# EAGLE board ssop28 (EAGLE 5.11)
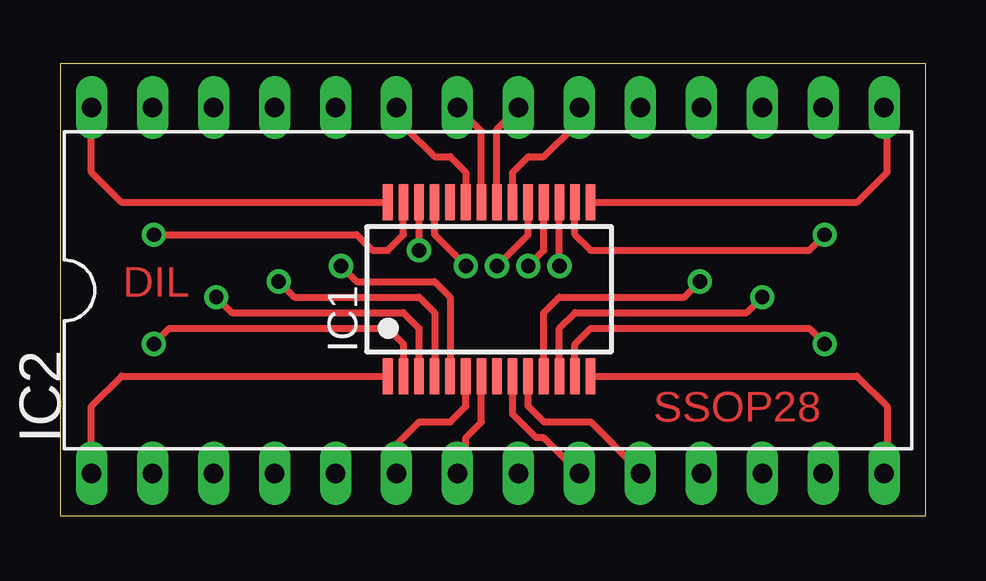
[diagram p0: board, top side]
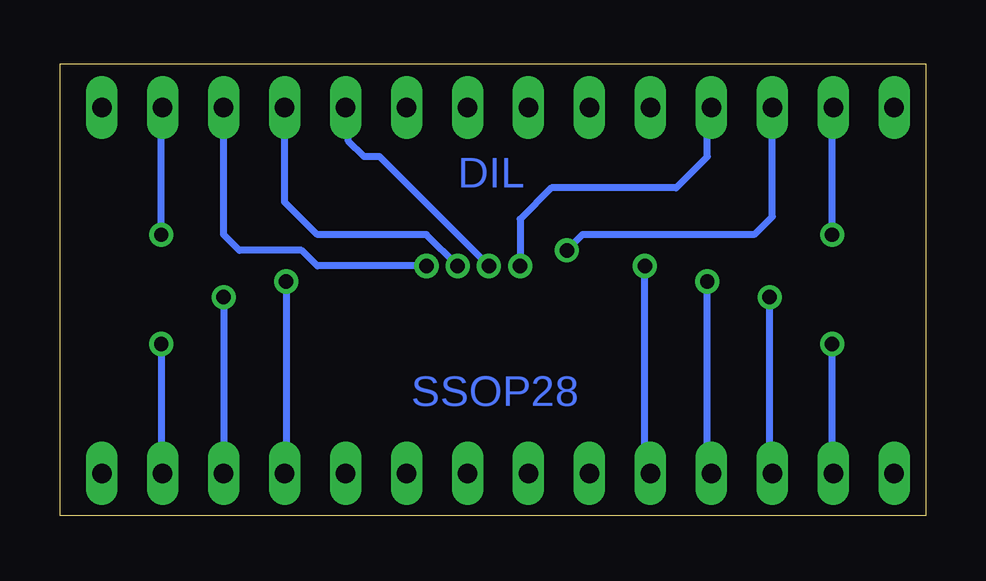
[diagram p1: board, bottom side, seen from below]

Size 36.07 x 18.83 mm. Coordinates in mm from the lower left corner, seen from the top.
Outline: 0,0 36.07,0 36.07,18.83 0,18.83 0,0
Copper layers (1*16): Top 0.035mm / dielectric 1.5mm / Bottom 0.035mm
Design rules "default *": minimum track width 0.15mm, minimum drill 0.6mm, track to track 0.15mm, track to pad 0.15mm, pad to pad 0.15mm, via to via 0.15mm, smd to smd 0.15mm, copper to edge 40mil, drill to drill 8mil, minimum pad ring 10mil, minimum via ring 8mil, stop-mask expansion 4mil, vias tented up to drill 0mil, thermal gap 10mil

## Footprints (pad centres in the part's own frame; a part is rotated, then mirrored left to right if it is on the bottom)
SSOP28 = smd 0.4 x 1.5: 1 -4.225,-3.625; 2 -3.575,-3.625; 3 -2.925,-3.625; 4 -2.275,-3.625; 5 -1.625,-3.625; 6 -0.975,-3.625; 7 -0.325,-3.625; 8 0.325,-3.625; 9 0.975,-3.625; 10 1.625,-3.625; 11 2.275,-3.625; 12 2.925,-3.625; 13 3.575,-3.625; 14 4.225,-3.625; 15 4.225,3.625; 16 3.575,3.625; 17 2.925,3.625; 18 2.275,3.625; 19 1.625,3.625; 20 0.975,3.625; 21 0.325,3.625; 22 -0.325,3.625; 23 -0.975,3.625; 24 -1.625,3.625; 25 -2.275,3.625; 26 -2.925,3.625; 27 -3.575,3.625; 28 -4.225,3.625
DIL28-6 = drill 0.813 long: 1 -16.51,-7.62; 2 -13.97,-7.62; 3 -11.43,-7.62; 4 -8.89,-7.62; 5 -6.35,-7.62; 6 -3.81,-7.62; 7 -1.27,-7.62; 8 1.27,-7.62; 9 3.81,-7.62; 10 6.35,-7.62; 11 8.89,-7.62; 12 11.43,-7.62; 13 13.97,-7.62; 14 16.51,-7.62; 15 16.51,7.62; 16 13.97,7.62; 17 11.43,7.62; 18 8.89,7.62; 19 6.35,7.62; 20 3.81,7.62; 21 1.27,7.62; 22 -1.27,7.62; 23 -3.81,7.62; 24 -6.35,7.62; 25 -8.89,7.62; 26 -11.43,7.62; 27 -13.97,7.62; 28 -16.51,7.62

## Placement (x,y rotation side)
IC1  FT232RL  [SSOP28]  17.87,9.43 0 top
IC2  [DIL28-6]  17.82,9.38 0 top

## Library data of the parts
IC1 = ftdichip; MPN: FT232RL; OC_FARNELL: 1146032; OC_NEWARK: 91K9918
IC2 = ic-package

## Nets
GND: IC1.7 IC2.7
N$1: IC1.20 IC2.20
N$2: IC1.4 IC2.4
N$3: IC1.19 IC2.19
N$4: IC1.27 IC2.27
N$5: IC1.28 IC2.28
N$6: IC1.17 IC2.17
N$7: IC1.15 IC2.15
N$8: IC1.16 IC2.16
N$9: IC1.25 IC2.25
N$10: IC1.1 IC2.1
N$11: IC1.5 IC2.5
N$12: IC1.3 IC2.3
N$13: IC1.11 IC2.11
N$14: IC1.2 IC2.2
N$15: IC1.9 IC2.9
N$16: IC1.10 IC2.10
N$17: IC1.6 IC2.6
N$18: IC1.21 IC2.21
N$19: IC1.18 IC2.18
N$21: IC1.26 IC2.26
N$22: IC1.12 IC2.12
N$23: IC1.14 IC2.14
N$24: IC1.13 IC2.13
N$25: IC1.22 IC2.22
N$26: IC1.23 IC2.23

## Tracks (layer width: path | path; a pad name or v marks a point on that pad's centre or on a via)
GND
  Top 0.3: IC1.7 17.55,3.9 16.9,3.25 16.9,2.11 IC2.7
N$1
  Top 0.3: IC1.20 18.85,14.29 19.5,14.95 20.15,14.95 21.45,16.25 21.45,16.82 IC2.20
N$2  (via drill 0.6)
  Top 0.3: IC1.4 15.6,8.46 14.95,9.1 9.75,9.1 v9.1,9.75
  Bottom 0.3: v9.1,9.75 9.1,1.93 IC2.4
N$3  (via drill 0.6)
  Top 0.3: IC1.19 19.5,11.7 v18.2,10.4
  Bottom 0.3: v18.2,10.4 22.75,14.95 23.4,14.95 24.05,15.6 24.05,16.88 IC2.19
N$4  (via drill 0.6)
  Top 0.3: IC1.27 14.3,11.7 13.65,11.05 13,11.05 12.35,11.7 v3.9,11.7
  Bottom 0.3: v3.9,11.7 3.9,16.95 IC2.27
N$5
  Top 0.3: IC1.28 2.54,13.05 1.3,14.3 IC2.28
N$6  (via drill 0.6)
  Top 0.3: IC1.17 v20.8,10.4
  Bottom 0.3: v20.8,10.4 25.35,10.4 26,11.05 28.6,11.05 29.25,11.7 IC2.17
N$7
  Top 0.3: IC1.15 33.2,13.05 34.45,14.3 34.45,16.88 IC2.15
N$8  (via drill 0.6)
  Top 0.3: IC1.16 21.45,11.71 22.1,11.05 31.2,11.05 v31.85,11.7
  Bottom 0.3: v31.85,11.7 31.85,16.94 IC2.16
N$9  (via drill 0.6)
  Top 0.3: IC1.25 15.6,11.71 v16.9,10.4
  Bottom 0.3: v16.9,10.4 16.9,12.35 15.6,13.65 10.4,13.65 9.1,14.95 9.1,16.83 IC2.25
N$10
  Top 0.3: IC1.1 2.55,5.8 1.3,4.55 IC2.1
N$11  (via drill 0.6)
  Top 0.3: IC1.5 16.25,9.11 15.6,9.75 12.35,9.75 v11.7,10.4
  Bottom 0.3: v11.7,10.4 11.7,1.99 IC2.5
N$12  (via drill 0.6)
  Top 0.3: IC1.3 14.95,7.8 14.3,8.45 7.15,8.45 v6.5,9.1
  Bottom 0.3: v6.5,9.1 6.5,1.87 IC2.3
N$13  (via drill 0.6)
  Top 0.3: IC1.11 20.14,8.45 20.8,9.1 26,9.1 v26.65,9.75
  Bottom 0.3: v26.65,9.75 26.65,1.82 IC2.11
N$14  (via drill 0.6)
  Top 0.3: IC1.2 14.3,7.15 13.65,7.8 4.55,7.8 v3.9,7.15
  Bottom 0.3: v3.9,7.15 3.9,1.81 IC2.2
N$15
  Top 0.3: IC1.9 18.85,4.23 19.82,3.25 20.14,3.25 IC2.9
N$16
  Top 0.3: IC1.10 19.5,4.55 20.15,3.9 22.1,3.9 24.05,1.95 24.05,1.88 IC2.10
N$17
  Top 0.3: IC2.6 14.01,2.96 14.95,3.9 16.25,3.9 16.9,4.55 IC1.6
N$18
  Top 0.3: IC1.21 18.2,16.11 IC2.21
N$19  (via drill 0.6)
  Top 0.3: v19.5,10.4 20.15,11.05 IC1.18
  Bottom 0.3: IC2.18 26.71,13.06 25.35,11.7 20.8,11.7 v19.5,10.4
N$21  (via drill 0.6)
  Top 0.3: v14.95,11.05 IC1.26
  Bottom 0.3: IC2.26 6.39,12.46 7.15,11.7 14.3,11.7 v14.95,11.05
N$22  (via drill 0.6)
  Top 0.3: IC1.12 20.8,7.79 21.45,8.45 28.6,8.45 v29.25,9.1
  Bottom 0.3: v29.25,9.1 IC2.12
N$23
  Top 0.3: IC1.14 33.2,5.8 34.45,4.55 34.45,1.88 IC2.14
N$24  (via drill 0.6)
  Top 0.3: IC1.13 21.45,7.14 22.1,7.8 31.2,7.8 v31.85,7.15
  Bottom 0.3: v31.85,7.15 31.85,1.82 IC2.13
N$25
  Top 0.3: IC1.22 17.55,16.01 IC2.22
N$26
  Top 0.3: IC1.23 16.89,14.3 16.25,14.95 15.6,14.95 14.3,16.25 14.3,16.71 IC2.23

## Text on the board
Top: DIL | SSOP28
Bottom: DIL | SSOP28